# Allegro board SHOWERHOST.brd
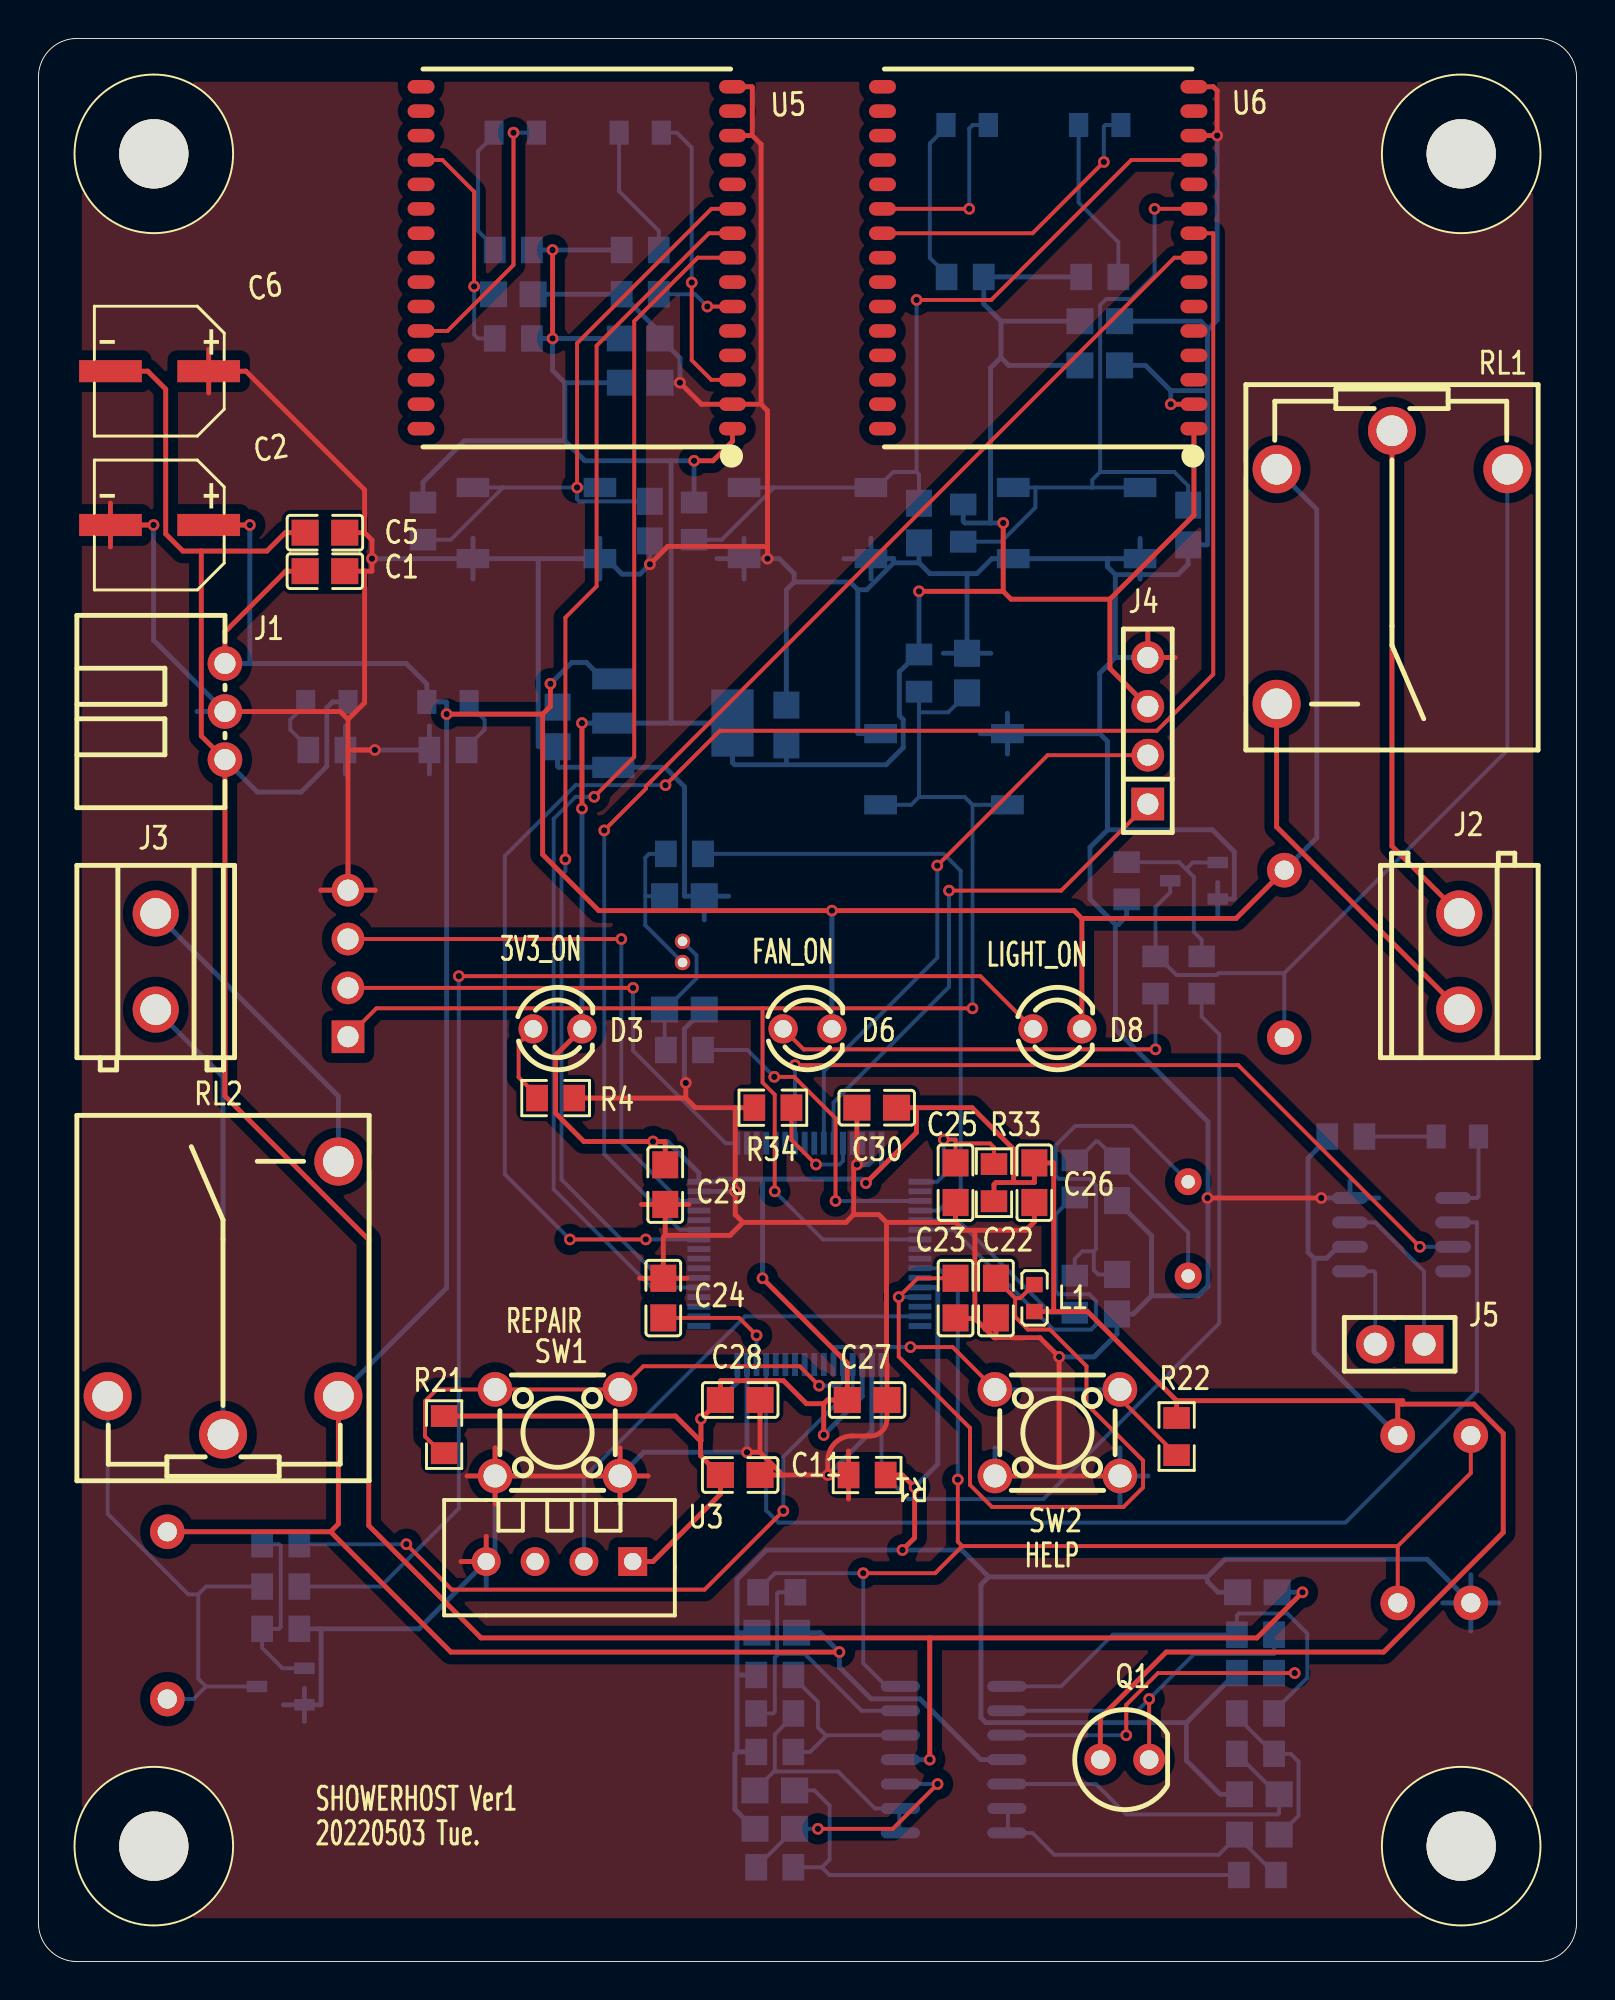
[diagram p0: board, top side]
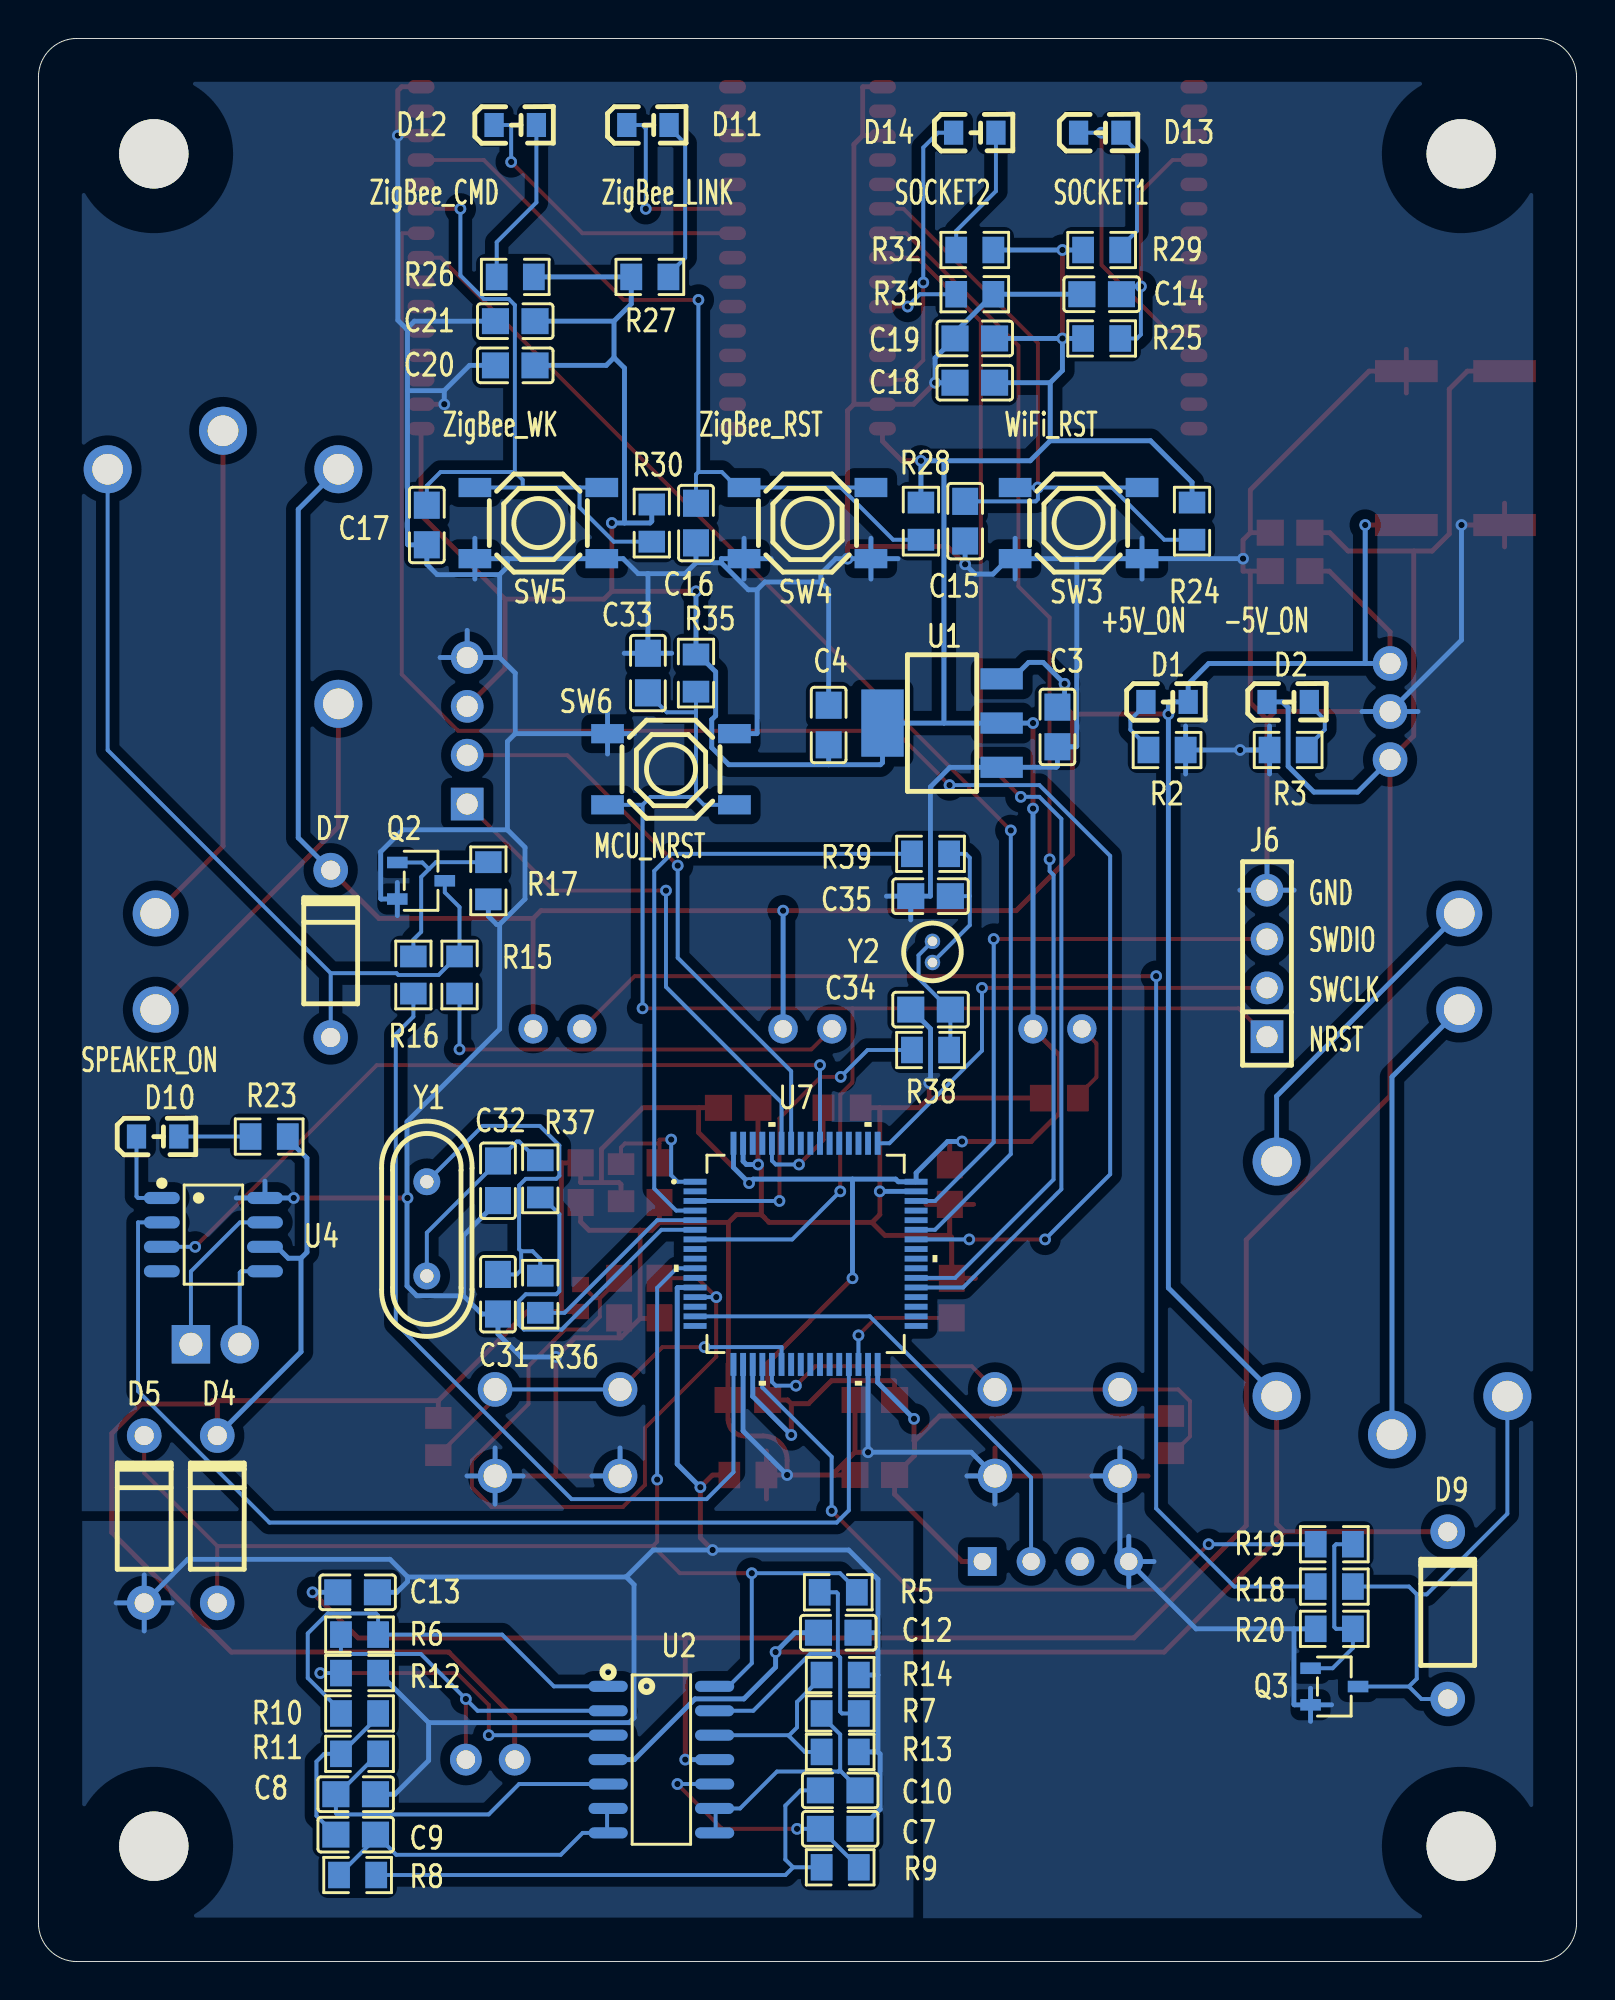
[diagram p1: board, bottom side, seen from below]

Outline 80 x 100 mm; copper layers: TOP, BOTTOM. Coordinates in mm from the lower left corner of the outline.
Outline path: 0,98 0,2 arc(0.59,0.59) 2,0 78,0 arc(79.41,0.59) 80,2 80,98 arc(79.41,99.41) 78,100 2,100 arc(0.59,99.41) 0,98

## Design rules (mm)
constraint set DEFAULT: min track width 0.203, pair gap 0.203
nets with their own width: min track width 0.254; nets 3V3 +5V -5V AGND GND

## Placement (name value [footprint] x y rotation side)
C1  100n  [C0805]  14.9 72.3 0 top
C2  220u  [C-220U]  6.3 74.7 0 top
C3  1u  [C0805]  27 64.2 270 bottom
C4  1u  [C0805]  38.9 64.3 90 bottom
C5  100n  [C0805]  14.9 74.3 180 top
C6  220u  [C-220U]  6.3 82.7 0 top
C7  100n  [C0805]  38.3 6.9 180 bottom
C8  100n  [C0805]  63.5 8.7 180 bottom
C9  1u  [C0805]  63.5 6.6 180 bottom
C10  1u  [C0805]  38.3 8.9 180 bottom
C11  100n  [C0805]  36.5 25.3 0 top
C12  100n  [C0805]  38.4 17.1 180 bottom
C13  100n  [C0805]  63.4 19.2 180 bottom
C14  100n  [C0805]  24.7 86.7 0 bottom
C15  100n  [C0805]  31.8 74.9 270 bottom
C16  100n  [C0805]  45.8 74.8 270 bottom
C17  100n  [C0805]  59.8 74.7 270 bottom
C18  10u  [C0805]  31.3 82.1 180 bottom
C19  100n  [C0805]  31.3 84.4 180 bottom
C20  10u  [C0805]  55.2 83 180 bottom
C21  100n  [C0805]  55.2 85.3 180 bottom
C22  1u  [C0805]  49.8 34.5 90 top
C23  100n  [C0805]  47.7 34.5 90 top
C24  2.2u  [C0805]  32.5 34.5 270 top
C25  1u  [C0805]  47.7 40.5 270 top
C26  100n  [C0805]  51.8 40.5 270 top
C27  100n  [C0805]  43.1 29.2 0 top
C28  100n  [C0805]  36.5 29.2 0 top
C29  100n  [C0805]  32.6 40.4 270 top
C30  100n  [C0805]  43.6 44.4 180 top
C31  20pF  [C0805]  56.1 34.7 270 bottom
C32  20pF  [C0805]  56.1 40.6 270 bottom
C33  100n  [C0805]  48.3 67 270 bottom
C34  15pF  [C0805]  33.6 49.5 0 bottom
C35  15pF  [C0805]  33.6 55.4 0 bottom
D1  +5V_ON  [LED0805-RD]  21.3 65.5 180 bottom
D2  -5V_ON  [LED0805-RD]  15 65.5 180 bottom
D3  3V3_ON  [LED-TH_BD3_0-P2_54-FD]  27 48.5 0 top
D4  1N4007  [DO-41_BD2_4-L4_7-P8_70-D0_6-RD]  70.7 23 270 bottom
D5  1N4007  [DO-41_BD2_4-L4_7-P8_70-D0_6-RD]  74.5 23 270 bottom
D6  FAN_ON  [LED-TH_BD3_0-P2_54-FD]  40 48.5 0 top
D7  1N4007  [DO-41_BD2_4-L4_7-P8_70-D0_6-RD]  64.8 52.4 270 bottom
D8  LIGHT_ON  [LED-TH_BD3_0-P2_54-FD]  53 48.5 0 top
D9  1N4007  [DO-41_BD2_4-L4_7-P8_70-D0_6-RD]  6.7 18 270 bottom
D10  SPEAKER_ON  [LED0805-RD]  73.8 42.9 180 bottom
D11  ZigBee_LINK  [LED0805-RD]  48.3 95.5 180 bottom
D12  ZigBee_CMD  [LED0805-RD]  55.2 95.5 180 bottom
D13  SOCKET1  [LED0805-RD]  24.8 95.1 180 bottom
D14  SOCKET2  [LED0805-RD]  31.3 95.1 180 bottom
J1  RH-30W_PORT  [CONN-TH_3P-P2_50_HX25003-3WAP]  9.7 65 270 top
J2  FAN_PORT  [CONN-TH_P5_00_KF127-5_0-2P]  73.9 52 270 top
J3  LIGHT_PORT  [CONN-TH_P5_00_KF127-5_0-2P]  6.1 52 90 top
J4  LCD_PORT  [HDR-TH_4P-P2_54-V-F]  57.7 64 90 top
J5  SPEAKER_PORT  [HDR-TH_2P-P2_54-V-F]  70.8 32.1 180 top
J6  SWD_PORT  [HDR-TH_4P-P2_54-V-F]  16.1 51.9 90 bottom
L1  FCM1608  [L0603]  51.8 34.5 270 top
NOREF  -  [unnamed]  74 6 0 top
NOREF#2  -  [unnamed]  6 94 0 top
NOREF#3  -  [unnamed]  74 94 0 top
NOREF#4  -  [unnamed]  6 6 0 top
Q1  HLPT5I850HP25  [LED-TH_BD5_0_BLUE]  56.5 10.5 90 top
Q2  S8050  [SOT-23-3_L2_9-W1_6-P1_90-LS2_8-BR]  60.1 56.2 0 bottom
Q3  S8050  [SOT-23-3_L2_9-W1_6-P1_90-LS2_8-BR]  12.6 14.3 0 bottom
R1  0  [R0805]  43.1 25.3 0 top
R2  1k  [R0805]  21.3 63 180 bottom
R3  1k  [R0805]  15 63 0 bottom
R4  1k  [R0805]  26.9 44.9 0 top
R5  10k  [R0805]  38.4 19.2 180 bottom
R6  10k  [R0805]  63.3 17 180 bottom
R7  10k  [R0805]  38.3 12.9 180 bottom
R8  91k  [R0805]  63.4 4.5 180 bottom
R9  27k  [R0805]  38.3 4.9 180 bottom
R10  330k  [R0805]  63.3 12.9 180 bottom
R11  9.1k  [R0805]  63.3 10.8 180 bottom
R12  10k  [R0805]  63.3 15 180 bottom
R13  10k  [R0805]  38.3 10.9 180 bottom
R14  10k  [R0805]  38.3 14.9 180 bottom
R15  1k  [R0805]  58.1 51.3 90 bottom
R16  8.2k  [R0805]  60.5 51.3 90 bottom
R17  51k  [R0805]  56.6 56.2 90 bottom
R18  1k  [R0805]  12.6 19.5 180 bottom
R19  8.2k  [R0805]  12.6 21.7 180 bottom
R20  51k  [R0805]  12.6 17.3 180 bottom
R21  1k  [R0805]  21.1 27.4 270 top
R22  1k  [R0805]  59.2 27.3 270 top
R23  330  [R0805]  68 42.9 0 bottom
R24  10k  [R0805]  20 74.9 270 bottom
R25  10k  [R0805]  24.7 84.4 180 bottom
R26  1k  [R0805]  55.2 87.6 0 bottom
R27  1k  [R0805]  48.2 87.6 180 bottom
R28  10k  [R0805]  34.1 74.9 270 bottom
R29  1k  [R0805]  24.7 89 180 bottom
R30  10k  [R0805]  48.1 74.8 270 bottom
R31  10k  [R0805]  31.3 86.7 180 bottom
R32  1k  [R0805]  31.3 89 0 bottom
R33  0  [R0805]  49.7 40.5 270 top
R34  10k  [R0805]  38.2 44.4 0 top
R35  100k  [R0805]  45.8 67 90 bottom
R36  0  [R0805]  53.9 34.7 90 bottom
R37  220  [R0805]  53.9 40.7 90 bottom
R38  0  [R0805]  33.6 47.4 180 bottom
R39  0  [R0805]  33.6 57.6 180 bottom
RL1  973-5VDC-SL-A  [RELAY-TH_973-XXVDC-SL-A]  70.4 72.5 270 top
RL2  973-5VDC-SL-A  [RELAY-TH_973-XXVDC-SL-A]  9.6 34.5 90 top
SW1  REPAIR  [SW-TH_4P-L6_0-W6_0-P4_50-LS6_5]  27 27.5 0 top
SW2  HELP  [SW-TH_4P-L6_0-W6_0-P4_50-LS6_5]  53 27.5 0 top
SW3  WiFi_RST  [SW-SMD_4P-L5_1-W5_1-P3_70-LS6_5-TL-2]  25.9 74.8 180 bottom
SW4  ZigBee_RST  [SW-SMD_4P-L5_1-W5_1-P3_70-LS6_5-TL-2]  40 74.8 180 bottom
SW5  ZigBee_WK  [SW-SMD_4P-L5_1-W5_1-P3_70-LS6_5-TL-2]  54 74.8 180 bottom
SW6  MCU_NRST  [SW-SMD_4P-L5_1-W5_1-P3_70-LS6_5-TL-2]  47.1 62 180 bottom
U1  TLV1117LV33  [SOT-223_L6_7-W3_5-P2_30-BR]  33 64.4 180 bottom
U2  TLV2374  [SOIC-14_L8_7-W3_9-P1_27-LS6_0-BL]  47.6 10.5 270 bottom
U3  DHT21  [NIL-NAMEMAPPER]  27.1 20.8 180 top
U4  WT588F08A-8S  [SOP-8_L4_9-W3_9-P1_27-LS6_0-BL]  70.9 37.8 270 bottom
U5  A51-C2G4A20S1a  [S24-PAD]  28 88.6 90 top
U6  A40-C2G4A04S1a  [S24-PAD]  52 88.6 90 top
U7  STM32F401RE  [LQFP64-10X10MM]  40.1 36.8 180 bottom
Y1  8MHz  [OSC-TH_L11_1-W4_7-P4_88]  59.8 38.1 90 bottom
Y2  32.768kHz  [OSC-TH_BD3_0-P1_10-D0_4]  33.5 52.5 270 bottom

## Library data of the parts
C1 C3-C5 C7-C35 = CAP NP
C2 C6 = CAP
D1-D3 D6 D8 D10-D14 = LED
D4 D5 D7 D9 = DIODE
J1 = CON3
J2 J3 J5 = CON2
J4 J6 = CON4
L1 = CHOKE
Q1 = PHOTO NPN_0
Q2 Q3 = BPW36/TO_0
R1-R39 = RESISTOR
RL1 RL2 = RELAY SPST
SW1-SW6 = SW PUSHBUTTON-SPST-2
U1 = TLV1117LV33DCYR
U2 = TLV2374ID
U3 = DHT21
U4 = WT588F08A-8S
U5 = A51-C2G4A20S1a_0
U6 = A40-C2G4A04S1a_0
U7 = STM32F401RET6_0
Y1 Y2 = CRYSTAL

## Footprints (pads in the part's own frame, mm; a bottom-side part is the same pattern mirrored in y, then rotated)
C0805
  rect 1.41x1.35 smd: 1(-1.03,0) 2(1.03,0)
C-220U
  rect 3.26x1.15 smd: 1(2.555,0) 2(-2.555,0)
CONN-TH_3P-P2_50_HX25003-3WAP
  round 1.8 hole 1.1: 1(-2.5,0) 2(0,0) 3(2.5,0)
CONN-TH_P5_00_KF127-5_0-2P
  round 2.4 hole 1.6: 1(-2.5,0) 2(2.5,0)
DO-41_BD2_4-L4_7-P8_70-D0_6-RD
  round 1.8 hole 1: 1(-4.35,0) 2(4.35,0)
HDR-TH_2P-P2_54-V-F
  rect 2x2 hole 1.2: 1(-1.27,0)
  round 2 hole 1.2: 2(1.27,0)
HDR-TH_4P-P2_54-V-F
  rect 1.7x1.7 hole 1.1: 1(-3.81,0)
  round 1.7 hole 1.1: 2(-1.27,0) 3(1.27,0) 4(3.81,0)
L0603
  rect 0.8x0.864 smd: 1(-0.7,0) 2(0.7,0)
LED0805-RD
  rect 1x1.25 smd: 1(-1.1,0) 2(1.1,0)
LED-TH_BD3_0-P2_54-FD
  round 1.524 hole 0.914: 1(-1.27,0) 2(1.27,0)
LED-TH_BD5_0_BLUE
  round 1.651 hole 0.965: 1(0,1.27) 2(0,-1.27)
LQFP64-10X10MM
  rect 1.194x0.305 smd: 1(-5.75,3.75) 2(-5.75,3.25) 3(-5.75,2.75) 4(-5.75,2.25) 5(-5.75,1.75) 6(-5.75,1.25) 7(-5.75,0.75) 8(-5.75,0.25) 9(-5.75,-0.25) 10(-5.75,-0.75) 11(-5.75,-1.25) 12(-5.75,-1.75) 13(-5.75,-2.25) 14(-5.75,-2.75) 15(-5.75,-3.25) 16(-5.75,-3.75) 33(5.75,-3.75) 34(5.75,-3.25) 35(5.75,-2.75) 36(5.75,-2.25) 37(5.75,-1.75) 38(5.75,-1.25) 39(5.75,-0.75) 40(5.75,-0.25) 41(5.75,0.25) 42(5.75,0.75) 43(5.75,1.25) 44(5.75,1.75) 45(5.75,2.25) 46(5.75,2.75) 47(5.75,3.25) 48(5.75,3.75)
  rect 0.305x1.194 smd: 17(-3.75,-5.75) 18(-3.25,-5.75) 19(-2.75,-5.75) 20(-2.25,-5.75) 21(-1.75,-5.75) 22(-1.25,-5.75) 23(-0.75,-5.75) 24(-0.25,-5.75) 25(0.25,-5.75) 26(0.75,-5.75) 27(1.25,-5.75) 28(1.75,-5.75) 29(2.25,-5.75) 30(2.75,-5.75) 31(3.25,-5.75) 32(3.75,-5.75) 49(3.75,5.75) 50(3.25,5.75) 51(2.75,5.75) 52(2.25,5.75) 53(1.75,5.75) 54(1.25,5.75) 55(0.75,5.75) 56(0.25,5.75) 57(-0.25,5.75) 58(-0.75,5.75) 59(-1.25,5.75) 60(-1.75,5.75) 61(-2.25,5.75) 62(-2.75,5.75) 63(-3.25,5.75) 64(-3.75,5.75)
NIL-NAMEMAPPER
  rect 1.5x1.5 hole 0.9: 1(-3.81,0)
  round 1.5 hole 0.9: 2(-1.27,0) 3(1.27,0) 4(3.81,0)
OSC-TH_BD3_0-P1_10-D0_4
  round 0.8 hole 0.5: 1(-0.55,0) 2(0.55,0)
OSC-TH_L11_1-W4_7-P4_88
  round 1.4 hole 0.7: 1(-2.45,0) 2(2.45,0)
R0805
  rect 1.133x1.377 smd: 1(-0.966,0) 2(0.966,0)
RELAY-TH_973-XXVDC-SL-A
  round 2.5 hole 1.6: 1(-5.1,-6) 2(-5.1,6) 3(7.1,-6) 4(-7.1,0)
S24-PAD
  oval 0.7x1.4 smd: 1(-8.89,-8.1) 2(-7.62,-8.1) 3(-6.35,-8.1) 4(-5.08,-8.1) 5(-3.81,-8.1) 6(-2.54,-8.1) 7(-1.27,-8.1) 8(0,-8.1) 9(1.27,-8.1) 10(2.54,-8.1) 11(3.81,-8.1) 12(5.08,-8.1) 13(6.35,-8.1) 14(7.62,-8.1) 15(8.89,-8.1) 16(8.89,8.1) 17(7.62,8.1) 18(6.35,8.1) 19(5.08,8.1) 20(3.81,8.1) 21(2.54,8.1) 22(1.27,8.1) 23(0,8.1) 24(-1.27,8.1) 25(-2.54,8.1) 26(-3.81,8.1) 27(-5.08,8.1) 28(-6.35,8.1) 29(-7.62,8.1) 30(-8.89,8.1)
SOIC-14_L8_7-W3_9-P1_27-LS6_0-BL
  oval 0.574x2.038 smd: 1(-3.81,-2.769) 2(-2.54,-2.769) 3(-1.27,-2.769) 4(0,-2.769) 5(1.27,-2.769) 6(2.54,-2.769) 7(3.81,-2.769) 8(3.81,2.769) 9(2.54,2.769) 10(1.27,2.769) 11(0,2.769) 12(-1.27,2.769) 13(-2.54,2.769) 14(-3.81,2.769)
SOP-8_L4_9-W3_9-P1_27-LS6_0-BL
  oval 0.63x1.865 smd: 1(-1.905,-2.682) 2(-0.635,-2.682) 3(0.635,-2.682) 4(1.905,-2.682) 5(1.905,2.682) 6(0.635,2.682) 7(-0.635,2.682) 8(-1.905,2.682)
SOT-23-3_L2_9-W1_6-P1_90-LS2_8-BR
  rect 1.07x0.6 smd: 1(1.235,-0.95) 2(1.235,0.95) 3(-1.235,0)
SOT-223_L6_7-W3_5-P2_30-BR
  rect 2.2x1.1 smd: 1(3.099,-2.3) 2(3.099,0) 3(3.099,2.3)
  rect 2.2x3.5 smd: 4(-3.099,0)
SW-SMD_4P-L5_1-W5_1-P3_70-LS6_5-TL-2
  rect 1.7x1 smd: 1(-3.3,1.849) 2(3.3,1.85) 3(-3.3,-1.85) 4(3.3,-1.85)
SW-TH_4P-L6_0-W6_0-P4_50-LS6_5
  round 1.8 hole 1.2: 1(-3.25,2.25) 2(3.25,2.25) 3(-3.25,-2.25) 4(3.25,-2.25)
unnamed
  round 3.6 hole 4.1 unplated: (0,0)

## Nets
3V3: C4.1 C11.1 C18.2 C19.2 C20.2 C21.2 C26.1 C27.1 C28.1 C29.1 C30.1 D3.2 D4.1(K) J4.3 L1.2 Q1.1 R21.1 R22.1 R23.1 R24.1 R25.1 R26.1 R27.1 R28.1 R29.1 R30.1 R32.1 R33.2 R35.2 U1.2 U1.4(OUT#4) U3.1(VDD) U4.6(VDD) U5.1(VCC) U6.1(VCC) U7.19 U7.32 U7.48 U7.64
+5V: C1.1 C2.1 C3.1 C12.1 D1.2 D6.2 D7.1(K) D8.2 D9.1(K) J1.1 RL1.1 RL2.1 U1.3 U2.4(VDD)
-5V: C5.2 C6.2 C13.1 D2.1(CATHODE) J1.3 U2.11
AGND: C7.2 C8.2 C12.2 C13.2 D5.2 R1.2 R12.2 R13.2 R14.2 U7.12
GND: C1.2 C2.2 C3.2 C4.2 C5.1 C6.1 C11.2 C14.2 C15.2 C16.2 C17.2 C18.1 C19.1 C20.1 C21.1 C22.1 C23.1 C24.1 C25.2 C26.2 C27.2 C28.2 C29.2 C30.2 C31.2 C32.2 C33.1 C34.2 C35.2 J1.2 J4.4 J6.4 Q2.2(EMITTER) Q3.2(EMITTER) R1.1 R2.2 R3.2 R4.2 R17.1 R20.1 R31.2 R34.1 SW1.3 SW1.4 SW2.3 SW2.4 SW3.3 SW3.4 SW4.3 SW4.4 SW5.3 SW5.4 SW6.1 SW6.2 U1.1 U3.4 U4.8 U5.2 U5.13 U5.15 U6.2 U6.13 U6.15 U7.18 U7.31 U7.47 U7.63
1IN+: R12.1 U2.3
1IN-: Q1.2(EMITTER) R6.1 U2.2
1OUT: R6.2 R10.1 U2.1
2IN+: C8.1 R11.2 U2.5
2IN-: C9.2 R8.1 U2.6 U2.7
3IN+: C7.1 R9.2 U2.10
3IN-: C10.2 R7.1 U2.8 U2.9
4IN+: R13.1 R14.1 U2.12
4IN-: R5.1 R7.2 U2.13
B1: R21.2 SW1.1 SW1.2 U7.21
B2: R22.2 SW2.1 SW2.2 U7.22
BOOT0: R34.2 U7.60
FAN_CONTROL: R16.1 U7.17
LCD_SCL: J4.2 U7.58
LCD_SDA: J4.1 U7.59
LIGHT_CONTROL: R19.1 U7.20
LIGHT_SENSOR: D4.2 D5.1(K) R5.2 U2.14 U7.10
NRST: C33.2 J6.1 R35.1 SW6.3 SW6.4 U7.7
PA0: U7.14
PA2: U7.16
PA7: U7.23
PA8: U7.41
PA11: U7.44
PA12: U7.45
PA13_SWDIO: J6.3 U7.46
PA14_SWCLK: J6.2 U7.49
PA15: U7.50
PB0: U7.26
PB1: U7.27
PB2: U7.28
PB4: U7.56
PB5: U7.57
PB8: U7.61
PB9: U7.62
PB12: U7.33
PB13: U7.34
PB14: U7.35
PB15: U7.36
PC0: U7.8
PC1: U7.9
PC3: U7.11
PC4: U7.24
PC5: U7.25
PC8: U7.39
PC9: U7.40
PC10: U7.51
PC11: U7.52
PC12: U7.53
PC13: U7.2
PC14-OSC32_IN: R38.1 U7.3
PC15-OSC32_OUT: R39.1 U7.4
PD2: U7.54
PF0-OSC_IN: R36.1 U7.5
PF1-OSC_OUT: R37.1 U7.6(PH1)
SPEAKER_CLK: U4.2 U7.29
SPEAKER_DATA: U4.3 U7.55
TEMPERATURE&HUMIDITY: U3.2 U7.15
WIFI_RX: U5.8 U7.37
WIFI_TX: U5.9 U7.38
ZIGBEE_RX: U6.9 U7.42
ZIGBEE_TX: U6.8 U7.43
N26683: D1.1(CATHODE) R2.1
N26775: D2.2 R3.1
N26855: D3.1(CATHODE) R4.1
N28017: C10.1 R8.2 R9.1
N28085: C9.1 R10.2 R11.1
N30803: J2.1 RL1.4
N30903: J2.2 RL1.3(NO)
N30911: D7.2 Q2.3 R15.2 RL1.2
N30979: Q2.1 R16.2 R17.2
N31316: J3.1 RL2.4
N31416: J3.2 RL2.3(NO)
N31424: D9.2 Q3.3 R18.2 RL2.2
N31492: Q3.1 R19.2 R20.2
N33878: C14.1 R25.2 U5.19
N34060: R31.1 U5.6
N34448: C15.1 R24.2 SW3.1 SW3.2 U5.10
N35827: D13.1(CATHODE) U5.26
N35831: D13.2 R29.2
N35952: D14.2 R32.2
N36022: D14.1(CATHODE) U5.3
N78755: D10.2 R23.2
N78779: D10.1(CATHODE) U4.1
N78813: J5.1 U4.7
N78817: J5.2 U4.5
N80062: C16.1 R28.2 SW4.1 SW4.2 U6.12
N80202: D12.2 R26.2
N80206: D11.2 R27.2
N80214: D11.1(CATHODE) U6.21
N80218: C17.1 R30.2 SW5.1 SW5.2 U6.10
N80258: D12.1(CATHODE) U6.22
N94714: D6.1(CATHODE) R15.1
N94912: D8.1(CATHODE) R18.1
N139451: C22.2 C23.2 L1.1 U7.13
N139639: C24.2 U7.30
N139647: C25.1 R33.1 U7.1
N140141: C31.1 R36.2 Y1.2
N140235: C32.1 R37.2 Y1.1
N140397: C34.1 R38.2 Y2.1
N140445: C35.1 R39.2 Y2.2

Pads without a net: U3 3; U4 4; U5 4 5 7 11 12 14 16 17 18 20 21 22 23 24 25 27 28 29 30; U6 3 4 5 6 7 11 14 16 17 18 19 20 23 24 25 26 27 28 29 30

## Via types
v1: diameter 0.61, hole 0.33, TOP to BOTTOM, 79 vias

## Routing (per net, layer and track width the routed paths; a pad name or vN(x,y) marks a point on that pad's centre or on a via; arc(x,y) is an arc through that point)
3V3: length 355.9
  TOP w0.254: 59.2,29.16 54.56,33.8 52.81,33.8 ; 59.2,29.16 70.96,29.16 70.96,28.99 ; 59.2,29.16 R22.1 ; 34.43,27.06 34.46,27.09 v1(34.46,28.22) 35.44,29.2 C28.1 35.47,30.18 35.5,30.21 38.75,30.21 39.94,29.01 40.84,29.01 ; 34.43,27.06 33.13,28.37 R21.1 ; 34.43,27.06 34.43,26.31 35.44,25.3 C11.1 35.47,24.31 31.96,20.8 U3.1 ; 55.73,70.84 60.1,75.21 U6.1 ; 55.73,70.84 50.59,70.84 50.18,71.25 ; 55.73,70.84 55.73,67.24 J4.3 ; 52.81,33.8 L1.2 ; 52.81,33.8 52.81,41.5 52.78,41.53 C26.1 51.8,40.52 51.79,40.51 50.72,40.51 ; U5.1 36.1,79.06 35.08,78.04 v1(34.1,78.04) ; C30.1 45.67,44.4 ; 45.67,44.4 45.67,43.11 v1(43.04,40.48) ; 45.67,44.4 48.56,44.4 50.72,42.24 50.72,40.51 ; 40.84,29.01 41.03,29.2 C27.1 42.07,31.12 v1(37.66,35.53) ; 40.84,29.01 v1(40.84,27.38) ; 70.96,28.99 74.66,28.99 76.19,27.46 76.19,22.32 69.96,16.09 58.66,16.09 55.23,12.66 Q1.1 ; 70.96,28.99 70.7,28.99 D4.1 ; D3.2 26.9,47.13 26.9,44.11 28.37,42.64 v1(31.96,42.64) 32.57,42.64 32.6,42.62 C29.1 ; v1(26.74,84.4) v1(26.74,89) ; v1(28.27,64.4) v1(28.27,59.95) ; R33.2 49.7,40.4 49.8,40.51 50.72,40.51 ; 50.18,71.25 v1(50.18,74.81) ; 50.18,71.25 v1(45.8,71.25)
  BOTTOM w0.254: 32.9,64.4 32.9,78.04 ; 32.9,64.4 U1.2 v1(28.27,64.4) ; 32.9,64.4 U1.4 36.1,62.35 36.21,62.23 38.9,62.23 ; 32.9,78.04 v1(34.1,78.04) R28.1 ; 32.9,78.04 28.42,78.04 27.38,79.08 ; 50.06,83.41 50.47,83 C20.2 ; 50.06,83.41 49.52,82.86 49.52,74.81 ; 50.06,83.41 50.06,85.3 ; 38.9,62.23 C4.1 ; 38.9,62.23 44.09,62.23 44.98,63.12 44.98,64.58 44.78,64.78 44.78,67.07 45.68,67.97 R35.2 v1(45.8,71.25) ; U7.32 36.35,30.11 v1(34.46,28.22) ; U7.64 43.85,41.29 v1(43.04,40.48) 42.83,40.68 37.66,40.68 ; 37.66,40.68 35.41,40.68 35.28,40.55 U7.48 34.35,41.01 32.71,42.64 v1(31.96,42.64) ; 37.66,40.68 v1(37.66,35.53) ; v1(28.27,59.95) D3.2 ; D4.1 66.35,31.7 66.35,36.57 ; 50.06,85.3 49.17,86.2 R27.1 R26.1 ; 50.06,85.3 C21.2 ; R30.1 48.1,74.9 48.19,74.81 49.52,74.81 ; 49.52,74.81 v1(50.18,74.81) ; U7.19 42.85,29.39 v1(40.84,27.38) ; R25.1 v1(26.74,84.4) ; v1(26.74,84.4) C19.2 ; v1(26.74,84.4) 26.74,82.73 27.38,82.1 ; R23.1 67.03,42.78 66.03,41.78 66.03,36.88 66.35,36.57 ; R29.1 v1(26.74,89) R32.1 ; 27.38,82.1 C18.2 ; 27.38,82.1 27.38,79.08 ; 27.38,79.08 22.16,79.08 20,76.92 R24.1 ; 66.35,36.57 67.01,36.57 67.6,37.17 U4.6
+5V: length 221.5
  TOP w0.254: 26.22,64.86 26.22,57.57 29.14,54.65 v1(41.27,54.65) 53.86,54.65 54.27,54.24 ; 26.22,64.86 v1(21.23,64.86) ; 26.22,64.86 26.63,65.27 v1(26.63,66.44) ; v1(41.66,16.09) 21.45,16.09 15.19,22.35 ; 54.27,54.24 62.29,54.24 D7.1 ; 54.27,54.24 D8.2 ; 15.19,22.35 15.6,22.76 RL2.1 ; 15.19,22.35 D9.1 ; C1.1 12.86,72.3 9.7,69.14 J1.1 ; C2.1 v1(10.99,74.7)
  BOTTOM w0.254: 10.99,67.5 19.13,67.5 20.2,66.43 D1.2 21.2,65.5 21.23,65.47 v1(21.23,64.86) 21.23,35.03 RL2.1 ; 10.99,67.5 v1(10.99,74.7) ; 10.99,67.5 J1.1 ; D6.2 v1(41.27,54.65) ; RL1.1 66.49,75.51 66.49,58.44 D7.1 ; U2.4 49.01,10.5 45.85,13.66 43.31,13.66 41.66,15.31 v1(41.66,16.09) 40.65,17.1 C12.1 ; C3.1 26.63,65.6 v1(26.63,66.44) 27.74,67.55 28.5,67.55 29.35,66.7 U1.3
-5V: length 145.1
  TOP w0.254: 8.47,73.35 7.51,73.35 6.62,74.23 6.62,81.76 5.68,82.7 C6.2 ; 8.47,73.35 11.88,73.35 12.83,74.3 C5.2 ; 8.47,73.35 8.47,63.73 J1.3 9.7,45.01 17.18,37.53 17.18,22.67 23.02,16.83 46.36,16.83 ; 46.36,16.83 63.37,16.83 v1(65.74,19.2) ; 46.36,16.83 v1(46.36,10.5)
  BOTTOM w0.254: D2.1 15.3,65.5 15,65.2 15,62.15 13.66,60.81 11.39,60.81 J1.3 ; C13.1 v1(65.74,19.2) ; U2.11 v1(46.36,10.5)
AGND: length 109.6
  TOP w0.254: v1(44.94,21.4) 45.57,22.03 v1(45.57,24.66) 44.94,25.3 R1.2
  BOTTOM w0.254: R12.2 62.28,15 59.71,12.42 ; 60.8,20 49.43,20 ; 60.8,20 61.72,20.92 72.23,20.92 D5.2 ; 60.8,20 60.8,19.76 61.36,19.2 C13.2 ; 49.43,20 48.03,21.4 v1(44.94,21.4) 37.86,21.4 36.33,19.88 36.33,17.1 ; 49.43,20 49.02,19.6 49.02,12.68 49.27,12.42 59.71,12.42 ; R14.2 36.33,14.9 ; 36.33,14.9 36.33,17.1 ; 36.33,14.9 36.33,10.9 ; 59.71,12.42 59.71,10.45 61.46,8.7 C8.2 ; 36.33,17.1 C12.2 ; U7.12 46.75,35.05 46.78,35.02 46.78,25.87 v1(45.57,24.66) ; C7.2 37.24,6.9 36.22,7.92 36.22,10.79 36.33,10.9 ; D5.2 74.5,17.19 ; D5.2 73.04,18.65 ; D5.2 75.96,18.65 ; D5.2 74.5,20.11 ; 36.33,10.9 R13.2
GND: length 565.5
  TOP w0.254: 37.59,80.98 37.92,80.65 37.92,73.58 ; 37.59,80.98 U5.2 34.49,80.98 v1(33.37,82.1) ; 37.59,80.98 37.59,94.49 37.13,94.95 ; 44.11,38.43 43.7,38.84 42.4,38.84 ; 44.11,38.43 47.7,38.43 ; 44.11,38.43 44.11,31.09 44.13,31.07 C27.2 44.13,28.19 arc(43.88,27.58) 43.27,27.33 42.32,27.33 arc(41.43,26.96) 41.06,26.07 v1(41.06,25.3) ; SW2.4 53.09,25.25 ; 53.09,25.25 SW2.3 ; 53.09,25.25 v1(53.09,31.44) 52.09,32.43 49.8,32.43 ; C24.1 32.5,37.66 32.6,37.76 ; C24.1 33.73,35.53 ; C24.1 31.27,35.53 ; C6.1 8.86,83.83 ; C6.1 10.79,82.7 16.97,76.52 16.97,74.3 ; C6.1 8.86,81.57 ; 23.75,23.79 SW1.3 ; SW1.3 SW1.4 ; SW1.3 22.29,25.25 ; SW1.3 23.75,26.71 ; 31.37,39.37 C29.2 ; C29.2 33.83,39.37 ; C29.2 32.6,37.76 ; C11.2 38.57,25.3 ; 38.57,25.3 38.57,25.45 37.53,26.48 ; 38.57,25.3 v1(41.06,25.3) ; 49.8,32.43 49.71,32.43 48.71,33.44 ; 49.8,32.43 C22.1 ; 32.6,37.76 35.97,37.76 36.65,38.43 ; 37.13,94.95 37.13,97.46 37.1,97.49 U5.15 ; 37.13,94.95 U5.13 ; 48.71,33.44 48.71,38.03 ; 48.71,33.44 47.73,33.44 C23.1 ; 16.97,74.3 17.35,73.92 v1(17.35,72.95) 17.35,72.3 16.97,72.3 ; 16.97,74.3 C5.1 ; 42.13,24.05 R1.1 ; R1.1 v1(41.06,25.3) ; R1.1 42.13,26.55 ; 37.92,73.58 v1(37.92,72.95) ; 37.92,73.58 32.73,73.58 v1(31.8,72.66) ; C25.2 47.7,38.43 ; 47.7,38.43 48.11,38.03 48.71,38.03 ; 42.4,38.84 42,38.43 36.65,38.43 ; 42.4,38.84 42.4,41.28 v1(42.57,41.45) C30.2 ; 36.24,44.4 34.17,44.4 33.67,44.9 ; 36.24,44.4 v1(36.24,40.05) 36.24,38.84 36.65,38.43 ; 36.24,44.4 R34.1 ; SW1.4 30.25,26.71 ; SW1.4 30.25,23.79 ; SW1.4 31.71,25.25 ; R4.2 33.67,44.9 ; 33.67,44.9 v1(33.67,45.69) ; U6.2 v1(58.89,80.98) ; U6.13 v1(61.31,94.95) 61.31,97.29 61.1,97.49 U6.15 ; C26.2 51.8,38.46 51.37,38.03 48.71,38.03 ; 37.53,26.48 C28.2 ; 37.53,26.48 v1(36.85,26.48) ; 57.7,69.22 J4.4 59.11,67.81 ; 16.97,72.3 16.97,65.46 16.1,64.59 ; 16.97,72.3 C1.2 ; 16.1,64.59 16.1,63 ; 16.1,64.59 15.69,65 J1.2 ; 16.1,63 v1(17.5,63) ; 16.1,63 J6.4 ; C2.2 v1(5.98,74.7) ; C2.2 3.74,75.83 ; C2.2 3.74,73.57 ; v1(66.72,39.71) v1(60.8,39.71) ; J6.4 17.51,55.71 ; J6.4 14.69,55.71 ; 21.98,20.8 U3.4 23.29,22.11
  BOTTOM w0.254: 60.85,84.89 60.44,85.3 C21.1 ; 60.85,84.89 61.31,85.35 v1(61.31,94.95) ; 60.85,84.89 60.81,84.85 60.81,81.69 ; U3.4 19.79,17.3 14.7,17.3 ; U3.4 23.75,21.26 SW1.3 ; U3.4 23.29,19.49 ; U3.4 23.29,22.11 ; U3.4 21.98,20.8 ; R3.2 v1(17.5,63) R2.2 ; R3.2 15.97,64.25 ; R3.2 15.97,61.75 ; v1(42.57,41.45) 43.18,41.45 43.35,41.62 U7.63 ; 58.89,81.69 60.81,81.69 ; 58.89,81.69 57.58,83 C20.1 ; 58.89,81.69 v1(58.89,80.98) ; 60.81,81.69 60.81,73.7 60.78,73.67 C17.2 59.8,72.66 59.26,72.12 56.01,72.12 ; SW3.4 22.6,74.01 ; SW3.4 v1(17.35,72.95) ; SW3.4 25.99,72.95 ; SW3.4 22.6,71.89 ; Q3.2 13.83,14.21 ; Q3.2 12.74,13.35 ; Q3.2 13.83,12.49 ; Q3.2 14.67,13.35 14.7,13.38 14.7,17.3 ; 56.01,53.93 56.01,48.49 60.83,43.67 60.83,39.73 v1(60.8,39.71) 60.83,39.68 60.83,35.13 60.32,34.62 57.89,34.62 ; 56.01,53.93 54.69,55.25 54.69,57.94 55.61,58.85 ; 56.01,53.93 56.17,53.93 56.6,54.36 R17.1 ; U4.8 69.71,39.71 ; U4.8 v1(66.72,39.71) ; U4.8 68.22,40.58 ; v1(53.09,31.44) 54.91,31.44 56.1,32.63 C31.2 56.94,33.67 57.89,34.62 ; 51.21,25.25 SW2.3 49.75,26.71 ; 56.01,72.12 55.61,72.53 55.61,72.95 ; 56.01,72.12 56.01,67.81 ; SW1.4 31.48,26.48 v1(36.85,26.48) U7.31 ; SW1.4 30.25,23.79 ; SW1.4 31.71,25.25 ; 45.8,72.73 46.36,72.17 48.3,72.17 ; 45.8,72.73 C16.2 ; 45.8,72.73 44.48,72.73 ; 34.63,54.17 C35.2 ; C35.2 33.62,55.4 33.61,55.41 33.61,61.08 32.59,62.1 U1.1 27.06,62.1 27,62.16 C3.2 26.02,63.17 25.99,63.2 25.99,72.95 ; C35.2 35.89,55.4 ; J1.2 5.98,68.72 v1(5.98,74.7) ; J1.2 8.24,65 ; J1.2 11.16,65 ; 48.3,72.17 C33.1 ; 48.3,72.17 48.81,72.17 49.59,72.95 SW5.4 55.61,72.95 ; C33.1 49.53,68.03 ; C33.1 47.07,68.03 ; 61.33,54.39 Q2.2 ; Q2.2 61.33,56.11 ; Q2.2 62.17,55.25 62.2,55.28 62.2,57.71 61.06,58.85 55.61,58.85 ; SW6.2 42.65,63.85 42.62,63.88 42.62,71.33 ; C32.2 56.1,39.54 57.89,37.75 57.89,34.62 ; 44.48,72.73 43.08,71.33 42.62,71.33 ; 44.48,72.73 44.48,72.95 SW4.3 ; 55.61,72.95 SW5.3 ; SW3.3 29.55,72.95 30.36,72.14 31.29,72.14 v1(31.8,72.66) C15.2 ; SW3.3 29.2,71.89 ; SW3.3 29.2,74.01 ; SW3.3 25.99,72.95 ; U7.47 v1(36.24,40.05) ; 50.4,62.79 SW6.1 ; SW6.1 48.99,63.85 ; SW6.1 50.4,64.91 ; SW6.1 55.2,63.85 ; J6.4 16.1,57.12 ; J6.4 14.69,55.71 ; J6.4 17.51,55.71 ; 55.2,63.85 55.61,63.44 55.61,58.85 ; 55.2,63.85 55.2,67 56.01,67.81 ; 56.01,67.81 J4.4 ; 32.35,84.4 33.37,83.38 v1(33.37,82.1) C18.1 ; 32.35,84.4 32.35,84.69 R31.2 C14.2 ; 32.35,84.4 C19.1 ; SW2.4 57.71,25.25 ; SW2.4 56.25,26.71 ; SW2.4 54.79,25.25 ; SW2.4 56.25,23.79 ; R2.2 20.33,64.25 ; R2.2 20.33,61.75 ; v1(41.06,25.3) 43.35,27.59 U7.18 ; SW1.3 25.21,25.25 ; SW1.3 23.75,26.71 ; J4.4 59.11,67.81 ; J4.4 57.7,69.22 ; SW4.4 36.7,74.01 ; SW4.4 35.29,72.95 ; SW4.4 v1(37.92,72.95) 38.53,72.95 39.31,72.17 39.31,71.74 ; SW4.4 36.7,71.89 ; 42.62,71.33 42.21,71.74 39.31,71.74 ; C34.2 34.6,49.5 33.6,48.5 33.6,45.76 v1(33.67,45.69) ; C4.2 38.9,71.33 39.31,71.74 ; SW5.3 57.3,74.01 ; SW5.3 57.3,71.89 ; 14.7,17.3 R20.1 ; 43.3,71.89 SW4.3 ; SW4.3 41.89,72.95 ; SW4.3 43.3,74.01
1IN+: length 18.3
  TOP w0.203: v1(56.58,11.77) 56.58,13.35 58.23,15 v1(65.34,15)
  BOTTOM w0.203: U2.3 v1(56.58,11.77) ; R12.1 v1(65.34,15)
1IN-: length 19.3
  TOP w0.203: Q1.2 v1(57.77,13.65)
  BOTTOM w0.203: U2.2 57.16,13.04 v1(57.77,13.65) 60.11,15.99 64.25,15.99 64.27,16.01 R6.1
1OUT: length 23.1
  BOTTOM w0.203: R10.1 64.27,13.02 65.99,14.75 65.99,17.06 64.95,18.1 62.44,18.1 62.33,17.99 R6.2 55.88,17 53.19,14.31 U2.1
2IN+: length 18.9
  BOTTOM w0.203: U2.5 55,9.23 56.58,7.65 64.46,7.65 64.53,7.72 C8.1 64.43,8.7 R11.2
2IN-: length 17.2
  BOTTOM w0.203: 50.42,6.69 50.42,7.91 U2.6 ; 50.42,6.69 U2.7 ; 50.42,6.69 51.69,6.69 52.83,5.55 61.39,5.55 62.44,6.6 C9.2 62.47,6.4 R8.1
3IN+: length 13.2
  TOP w0.203: v1(46.76,9.23) 44.43,6.9 v1(40.54,6.9)
  BOTTOM w0.203: U2.10 v1(46.76,9.23) ; R9.2 39.33,6.9 C7.1 v1(40.54,6.9)
3IN-: length 13.5
  BOTTOM w0.203: 44.78,7.96 44.78,6.74 U2.8 ; 44.78,7.96 U2.9 ; 44.78,7.96 43.51,7.96 41.59,9.88 38.4,9.88 ; C10.2 38.25,9.88 38.4,9.88 ; 38.4,9.88 38.3,9.98 38.3,11.81 39.27,12.78 R7.1
4IN+: length 9.8
  BOTTOM w0.203: 40.95,11.77 40.54,12.18 40.54,13.5 39.27,14.78 R14.1 ; 40.95,11.77 U2.12 ; 40.95,11.77 40.95,11.71 40.14,10.9 R13.1
4IN-: length 15.8
  BOTTOM w0.203: 38.42,16 38.42,15.93 38.3,15.8 38.3,13 38.2,12.9 R7.2 ; 38.42,16 38.42,19.12 38.5,19.2 R5.1 ; 38.42,16 39.86,16 42.82,13.04 U2.13
B1: length 27.1
  TOP w0.203: R21.2 20.98,26.43 20.11,27.3 20.11,29.14 20.72,29.75 SW1.1 SW1.2 31.45,30.95 39.59,30.95 v1(40.6,29.95)
  BOTTOM w0.203: v1(40.6,29.95) 41.65,29.95 41.85,30.14 U7.21
B2: length 21.4
  TOP w0.203: SW2.2 56.25,29.28 R22.2 ; SW2.1 47.55,31.95 v1(45.35,31.95)
  BOTTOM w0.203: U7.22 41.35,31.95 v1(45.35,31.95) ; SW2.1 SW2.2
BOOT0: length 5.9
  TOP w0.203: v1(40.44,41.45) 39.17,42.72 R34.2
  BOTTOM w0.203: v1(40.44,41.45) 41.65,41.45 41.85,41.64 U7.60
FAN_CONTROL: length 45.1
  BOTTOM w0.203: R16.1 60.5,49.13 61.41,48.22 61.41,33.19 52.27,24.04 45.25,24.04 43.85,25.44 U7.17
LCD_SCL: length 30.2
  TOP w0.203: v1(46.75,56.99) 52.49,62.73 J4.2
  BOTTOM w0.203: v1(46.75,56.99) 46.75,52.2 40.85,46.3 U7.58
LCD_SDA: length 27.8
  TOP w0.203: v1(47.36,55.69) 53.2,55.69 J4.1
  BOTTOM w0.203: v1(47.36,55.69) 47.36,50.68 41.35,44.67 U7.59
LIGHT_CONTROL: length 37
  TOP w0.203: v1(19.14,21.7) 21.5,19.34 34.65,19.34 v1(38.74,23.44)
  BOTTOM w0.203: R19.1 v1(19.14,21.7) ; U7.20 42.35,29.85 38.74,26.25 v1(38.74,23.44)
LIGHT_SENSOR: length 67.6
  TOP w0.203: 48.05,21.6 70.7,21.6 ; 48.05,21.6 47.82,21.83 v1(47.82,25.06) ; 48.05,21.6 46.64,20.19 v1(42.9,20.19) ; 70.7,21.6 D4.2 ; 70.7,21.6 74.5,25.4 D5.1
  BOTTOM w0.203: v1(47.82,25.06) 47.82,35.03 46.8,36.05 U7.10 ; R5.2 37.43,19.32 38.3,20.19 v1(42.9,20.19) 42.9,15.51 44.1,14.31 U2.14
NRST: length 77.4
  TOP w0.203: 37.66,49.57 17.58,49.57 J6.1 ; 37.66,49.57 37.66,45.71 38.3,45.08 v1(38.3,40.05) ; 37.66,49.57 v1(48.58,49.57)
  BOTTOM w0.203: SW6.4 45.39,60.15 45.8,60.56 ; R35.1 45.8,64.96 ; 45.8,64.96 45.8,60.56 ; 45.8,64.96 47.32,64.96 48.3,65.94 C33.2 ; 45.8,60.56 48.17,60.56 48.58,60.15 ; v1(38.3,40.05) 40.79,37.55 U7.7 ; 48.58,60.15 SW6.3 ; 48.58,60.15 v1(48.58,49.57)
PA13_SWDIO: length 30.1
  TOP w0.203: J6.3 v1(30.32,53.17)
  BOTTOM w0.203: v1(30.32,53.17) 30.32,42.6 33.36,39.55 U7.46
PA14_SWCLK: length 25.5
  TOP w0.203: J6.2 v1(30.93,50.63)
  BOTTOM w0.203: v1(30.93,50.63) 30.93,47.36 35.74,42.55 U7.49
PC14-OSC32_IN: length 17.1
  TOP w0.203: v1(38.27,46) 39.3,46 41.46,43.84 v1(41.46,39.55)
  BOTTOM w0.203: R38.1 36.88,47.4 v1(38.27,46) ; U7.3 v1(41.46,39.55)
PC15-OSC32_OUT: length 32.9
  BOTTOM w0.203: R39.1 47.08,57.6 47.97,56.71 47.97,40.19 46.83,39.05 U7.4
PF0-OSC_IN: length 10
  BOTTOM w0.203: U7.5 47.82,38.55 52.63,33.73 R36.1
PF1-OSC_OUT: length 20.3
  BOTTOM w0.203: U7.6 47.6,38.05 52.79,32.86 54.75,32.86 55,33.11 55,34.35 54.65,34.7 53.07,34.7 52.91,34.86 52.91,38.86 53.78,39.73 R37.1
SPEAKER_CLK: length 57.7
  BOTTOM w0.203: U4.2 74.82,38.44 74.82,29.66 67.98,22.83 38.49,22.83 37.85,23.46 U7.29
SPEAKER_DATA: length 42.2
  TOP w0.203: v1(71.85,37.17) 62.4,46.61 v1(39.35,46.61)
  BOTTOM w0.203: U4.3 v1(71.85,37.17) ; U7.55 v1(39.35,46.61)
TEMPERATURE&HUMIDITY: length 25.3
  BOTTOM w0.203: U3.2 28.37,25.16 36.76,33.55 U7.15
WIFI_RX: length 63.6
  TOP w0.203: v1(28.9,60.56) 30.99,62.65 30.99,85.3 34.29,88.6 U5.8
  BOTTOM w0.203: v1(28.9,60.56) 27.94,60.56 26.8,59.42 26.8,40.16 31.9,35.05 U7.37
WIFI_TX: length 62.9
  TOP w0.203: U5.9 34.87,89.87 29.03,84.03 29.03,71.51 27.41,69.89 v1(27.41,57.31)
  BOTTOM w0.203: v1(27.41,57.31) 27.41,56.7 27.2,56.5 27.2,40.67 32.32,35.55 U7.38
ZIGBEE_RX: length 92.8
  TOP w0.203: U6.9 61.1,89.87 61.1,66.93 58.17,64 35.44,64 v1(32.61,61.17) ; v1(31.59,37.55) v1(27.64,37.55)
  BOTTOM w0.203: v1(27.64,37.55) 24.26,40.94 24.26,57.49 27.94,61.17 v1(32.61,61.17) ; U7.42 v1(31.59,37.55)
ZIGBEE_TX: length 66.5
  TOP w0.203: U6.8 59.08,88.6 31.6,61.12 31.6,60.99 v1(29.43,58.82)
  BOTTOM w0.203: v1(29.43,58.82) 29.43,41.99 33.36,38.05 U7.43
N26683: length 3.2
  BOTTOM w0.203: D1.1 22.4,65.38 23.2,64.57 23.2,64.06 22.27,63.12 R2.1
N26775: length 3.2
  BOTTOM w0.203: R3.1 14.03,63.12 13.1,64.06 13.1,64.57 13.9,65.38 D2.2
N26855: length 4.3
  TOP w0.203: D3.1 24.98,47.75 24.98,45.98 25.93,45.02 R4.1
N28017: length 28.9
  BOTTOM w0.203: 40.75,4.9 41.15,4.5 R8.2 ; 40.75,4.9 41.15,5.31 41.15,8.11 40.36,8.9 C10.1 ; 40.75,4.9 R9.1
N28085: length 8.6
  BOTTOM w0.203: C9.1 64.56,6.6 65.54,7.58 65.54,10.4 65.14,10.8 R11.1 62.33,12.73 R10.2
N30803: length 26.5
  TOP w0.254: RL1.4 70.4,58 J2.1
N30903: length 19.8
  TOP w0.254: RL1.3 64.4,59 J2.2
N30911: length 45.7
  BOTTOM w0.203: 64.8,51.4 D7.2 ; 64.8,51.4 76.4,63 RL1.2 ; 64.8,51.4 61.38,51.4 61.28,51.3 59.19,51.3 58.22,52.27 R15.2 58.1,54.83 58.86,55.6 Q2.3
N30979: length 9.9
  BOTTOM w0.203: R16.2 60.5,53.14 60.09,53.54 60.09,56.4 59.69,56.8 ; Q2.1 60.03,57.15 59.69,56.8 ; 59.69,56.8 59.33,57.17 R17.2
N31316: length 23.5
  BOTTOM w0.254: J3.1 9.6,46 RL2.4
N31416: length 16.8
  BOTTOM w0.254: RL2.3 15.6,45 J3.2
N31424: length 25.9
  BOTTOM w0.203: 8.72,14.3 8.07,13.65 D9.2 ; 8.72,14.3 8.31,14.71 8.31,19.09 ; 8.72,14.3 Q3.3 ; RL2.2 3.6,23.28 7.79,19.09 8.31,19.09 ; R18.2 8.72,19.5 8.31,19.09
N31492: length 9.9
  BOTTOM w0.203: R19.2 12.5,21.7 12.6,21.6 12.6,17.4 12.5,17.3 R20.2 11.63,16.31 12.69,15.25 Q3.1
N33878: length 13.2
  TOP w0.203: v1(22.66,87.11) 22.66,92.03 21.01,93.68 U5.19
  BOTTOM w0.203: R25.2 22.86,84.4 22.66,84.6 v1(22.66,87.11) 23.26,87.11 C14.1
N34060: length 4.1
  TOP w0.203: U5.6 v1(34.79,86.06)
  BOTTOM w0.203: R31.1 34.15,86.7 v1(34.79,86.06)
N34448: length 34.8
  TOP w0.203: U5.10 35,91.14 28.02,84.16 v1(28.02,76.65)
  BOTTOM w0.203: C15.1 28.13,75.93 28.02,76.04 v1(28.02,76.65) ; 24.16,76.65 24.16,76.65 SW3.2 ; 24.16,76.65 v1(28.02,76.65) ; 24.16,76.65 21.45,73.93 R24.2 ; v1(28.02,76.65) SW3.1
N35827: length 14.3
  TOP w0.203: v1(24.71,95.1) 24.71,88.22 21.28,84.79 U5.26
  BOTTOM w0.203: D13.1 v1(24.71,95.1)
N35831: length 6.8
  BOTTOM w0.203: R29.2 23.73,89.12 22.86,89.99 22.86,94.14 23.7,94.97 D13.2
N35952: length 7
  BOTTOM w0.203: D14.2 30.2,92.06 32.27,89.99 R32.2
N36022: length 15.5
  TOP w0.203: U5.3 34.99,82.25 33.98,83.27 v1(33.98,87.31)
  BOTTOM w0.203: D14.1 33.2,95.1 33.98,94.33 v1(33.98,87.31)
N78755: length 3.7
  BOTTOM w0.203: D10.2 R23.2
N78779: length 4.5
  BOTTOM w0.203: D10.1 74.9,39.79 74.82,39.71 U4.1
N78813: length 8.7
  BOTTOM w0.203: J5.1 72.07,35.89 69.52,38.44 U4.7
N78817: length 5.1
  BOTTOM w0.203: J5.2 69.53,35.82 69.45,35.9 U4.5
N80062: length 42.7
  TOP w0.203: v1(45.67,86.4) 49.56,86.4 56.84,93.68 U6.12
  BOTTOM w0.203: R28.2 35.55,73.93 38.26,76.65 ; v1(45.67,86.4) 45.67,77.45 ; 45.67,77.45 44.46,77.45 43.65,76.65 SW4.1 38.26,76.65 ; 45.67,77.45 45.8,77.33 C16.1 ; 38.26,76.65 38.26,76.65 SW4.2
N80202: length 8.8
  BOTTOM w0.203: R26.2 56.17,89.41 54.1,91.47 D12.2
N80206: length 8.6
  BOTTOM w0.203: D11.2 47.2,95.37 46.36,94.54 46.36,88.59 47.23,87.72 R27.2
N80214: length 9.8
  TOP w0.203: U6.21 v1(48.41,91.14)
  BOTTOM w0.203: D11.1 48.6,95.5 48.41,95.32 v1(48.41,91.14)
N80218: length 36.7
  TOP w0.203: U6.10 v1(58.05,91.14)
  BOTTOM w0.203: C17.1 59.8,76.74 59.09,77.45 55.22,77.45 ; 54.81,76.65 54.81,77.05 55.22,77.45 ; 54.81,76.65 51.85,76.65 ; 54.81,76.65 SW5.1 ; 55.22,77.45 55.22,86.14 55.53,86.45 56.83,86.45 58.05,87.68 v1(58.05,91.14) ; 51.85,76.65 51.85,75.61 50.08,73.83 R30.2 ; 51.85,76.65 SW5.2
N80258: length 15.8
  TOP w0.203: U6.22 51.7,89.87 v1(55.41,93.58)
  BOTTOM w0.203: v1(55.41,93.58) 55.41,95.42 55.5,95.5 D12.1
N94714: length 22.7
  TOP w0.203: v1(58.1,47.43) 39.8,47.43 D6.1
  BOTTOM w0.203: R15.1 v1(58.1,47.43)
N94912: length 68.7
  TOP w0.203: D8.1 48.99,51.24 v1(21.87,51.24)
  BOTTOM w0.203: v1(21.87,51.24) 21.87,23.56 17.8,19.5 R18.1
N139451: length 43.1
  TOP w0.203: 49.8,35.5 50.8,34.5 50.8,33.53 51.46,32.87 52.61,32.87 54.51,30.96 54.51,28.99 57.45,26.05 57.45,24.65 56.44,23.64 49.6,23.64 48.45,24.78 48.45,27.74 44.75,31.45 v1(44.75,34.55) 45.73,35.53 C23.2 ; 49.8,35.5 C22.2 49.8,35.5 ; 49.8,35.5 50.81,34.49 51.06,34.49 51.77,35.2 L1.1
  BOTTOM w0.203: U7.13 v1(44.75,34.55)
N139639: length 6.7
  TOP w0.203: C24.2 36.44,33.47 v1(37.35,32.56)
  BOTTOM w0.203: U7.30 v1(37.35,32.56)
N139647: length 8
  TOP w0.203: R33.1 49.7,42.34 49.5,42.54 47.7,42.54 ; C25.1 47.7,42.54 ; 47.7,42.54 47.7,42.74 v1(47.09,42.74)
  BOTTOM w0.203: v1(47.09,42.74) 47.09,40.89 46.75,40.55 U7.1
N140141: length 20.2
  BOTTOM w0.203: 54.89,36.94 55,37.04 55,40.35 54.65,40.7 53.07,40.7 52.91,40.86 52.91,42.44 53.92,43.45 56.9,43.45 Y1.2 ; 54.89,36.94 54.3,36.94 53.9,36.54 R36.2 ; 54.89,36.94 54.89,35.96 55.12,35.73 C31.1
N140235: length 10.6
  BOTTOM w0.203: R37.2 54.02,41.67 55,42.64 55.12,42.64 56.1,41.66 C32.1 56.1,41.6 59.8,37.9 Y1.1
N140397: length 6.7
  BOTTOM w0.203: R38.2 32.57,47.46 C34.1 32.6,49.5 34.22,51.13 34.22,52.33 Y2.1
N140445: length 8.4
  BOTTOM w0.203: 31.56,55.4 31.56,53.89 Y2.2 ; 31.56,55.4 31.56,57.4 31.76,57.6 R39.2 ; 31.56,55.4 C35.1

## Copper pours and planes (outline as drawn; the poured copper is in the pictures)
AGND on BOTTOM: 34.49,22.91 34.49,2.29 77.72,2.29 77.72,22.91 ; 8 cut-outs
GND on TOP: 77.75,2.25 2.25,2.25 2.25,97.75 77.75,97.75 ; 30 cut-outs
GND on BOTTOM: 77.75,2.25 2.25,2.25 2.25,97.75 77.75,97.75 ; 41 cut-outs

## Text on the board
Ref Des/Silkscreen Bottom: GND | SWDIO | SWCLK | NRST | -5V_ON | +5V_ON | SOCKET1 | WiFi_RST | SOCKET2 | ZigBee_RST | ZigBee_LINK | MCU_NRST | ZigBee_WK | ZigBee_CMD | SPEAKER_ON
Ref Des/Silkscreen Top: SHOWERHOST Ver1 | 20220503 Tue. | 3V3_ON | REPAIR | FAN_ON | LIGHT_ON | HELP
NCLEGEND-1-2: FIGURE | FINISHED_SIZE | 13.0 | 161.42 | 19.69x19.69 | 27.56x27.56 | 35.43x35.43 | 36.0x36.0 | 38.0x38.0 | 39.37x39.37 | 43.31x43.31 | 47.24x47.24 | 62.99x62.99 | DRILL CHART: TOP to BOTTOM | ALL UNITS ARE IN MILS | ROTATION | - | 90.000 | 0.000 | PLATED | NON-PLATED | QTY | 79 | 4 | 2 | 6 | 8 | 11 | 10 | 12
